# EAGLE board soic8 (EAGLE 5.07)
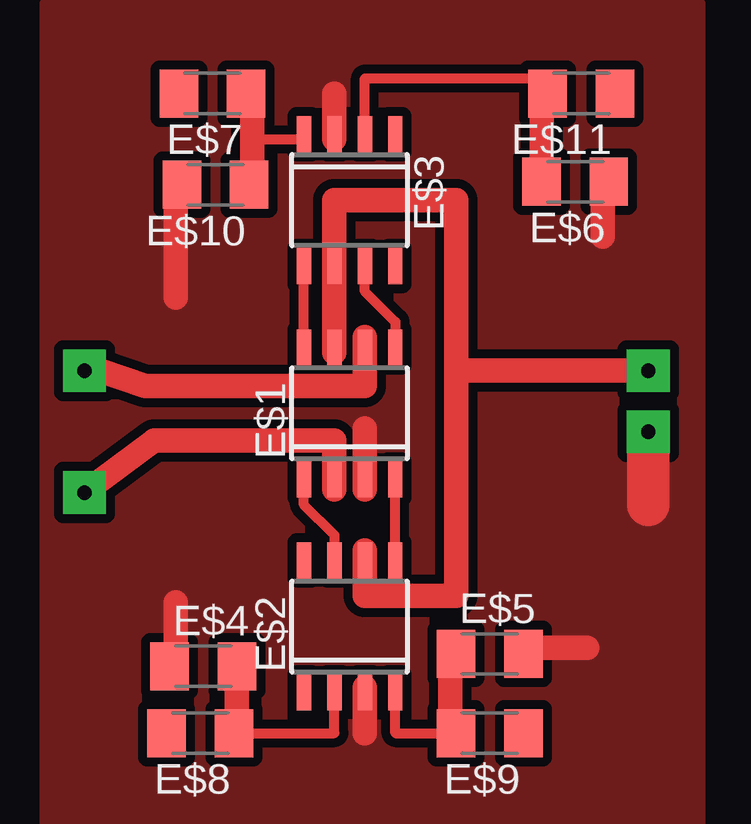
[diagram p0: board, top side]
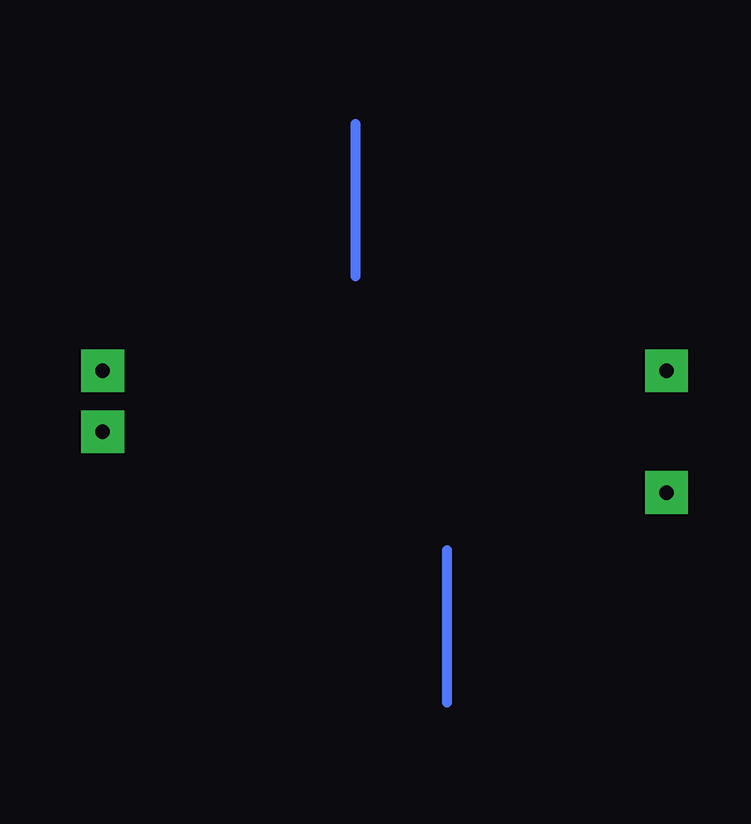
[diagram p1: board, bottom side, seen from below]

No outline drawn. Coordinates in mm, seen from the top.
Copper layers (1*16): Top 0.035mm / dielectric 1.5mm / Bottom 0.035mm
Design rules "default *": minimum track width 10mil, minimum drill 24mil, track to track 15mil, track to pad 20mil, pad to pad 8mil, via to via 8mil, smd to smd 8mil, copper to edge 40mil, drill to drill 8mil, minimum pad ring 10mil, minimum via ring 8mil, stop-mask expansion 4mil, vias tented up to drill 0mil, thermal gap 10mil

## Footprints (pad centres in the part's own frame; a part is rotated, then mirrored left to right if it is on the bottom)
SOIC8 = smd 0.6 x 1.5: 1 -1.905,-2.75; 2 -0.635,-2.75; 3 0.635,-2.75; 4 1.905,-2.75; 5 1.905,2.75; 6 0.635,2.75; 7 -0.635,2.75; 8 -1.905,2.75
M1206 = smd 1.6 x 2: 1 -1.4,0; 2 1.4,0

## Placement (x,y rotation side)
E$1  [SOIC8]  12.95,17.27 0 top
E$2  [SOIC8]  12.95,8.38 0 top
E$3  [SOIC8]  12.95,26.16 180 top
E$4  [M1206]  6.86,6.73 0 top
E$5  [M1206]  18.8,7.24 0 top
E$6  [M1206]  22.35,26.92 180 top
E$7  [M1206]  7.24,30.61 180 top
E$8  [M1206]  6.73,3.94 180 top
E$9  [M1206]  18.8,3.94 180 top
E$10  [M1206]  7.37,26.8 180 top
E$11  [M1206]  22.61,30.61 180 top

## Library data of the parts
E$1-E$3 = linear
E$4-E$11 = rcl

## Tracks (layer width: path | path; a pad name or v marks a point on that pad's centre or on a via)
GND
  Top 1.016: 13.59,3.94 13.59,5.84 | 13.59,14.1 13.59,16.64 | 12.32,28.7 12.32,30.61 | 23.5,24.64 23.5,26.54 | 5.71,22.1 5.71,26.54 | 5.71,7.49 5.71,9.4 | 20.32,7.49 22.86,7.49
  Top 1.778: 25.4,13.46 25.4,16
  pour Top: 0.25,34.42 27.56,34.42 27.56,0.13 0.25,0.13
S$1
  Top 0.406: 11.05,20.45 11.05,22.99
S$2
  Top 0.406: 13.59,22.99 13.59,22.35 14.86,21.08 14.86,20.45
S$3
  Top 1.016: 12.32,19.81 12.32,22.99
S$4
  Top 1.016: 20.95,27.81 20.95,30.99
S$5
  Bottom 0.406: 11.05,5.21 11.05,11.56
S$6
  Bottom 0.406: 14.86,22.99 14.86,29.34
S$7
  Top 0.406: 12.32,11.56 12.32,12.19 11.05,13.46 11.05,14.1
S$8
  Top 0.406: 14.86,10.92 14.86,14.1
S$9  (via drill 0.6 pad 1.78)
  Top 1.016: 13.59,11.56 13.59,9.65 17.4,9.65 17.4,19.05 | 17.4,19.05 17.4,26.16 12.32,26.16 12.32,22.99 | 17.4,19.05 v25.4,19.05 25.65,19.05
S$10  (via drill 0.6 pad 1.78)
  Top 1.016: 13.59,20.45 13.59,18.41 4.45,18.41 2.54,19.05 v1.91,19.05 2.16,19.05
S$11
  Top 1.016: 12.32,14.1 12.32,16.13 4.83,16.13 1.91,13.97
S$12
  Top 1.016: 8.89,27.81 8.89,30.35
S$13
  Top 0.406: 9.14,28.7 11.05,28.7
S$14
  Top 0.406: 20.57,31.24 13.59,31.24 13.59,29.34
S$15
  Top 0.406: 8.51,3.94 12.32,3.94 12.32,5.21
S$16
  Top 0.406: 14.86,5.21 14.86,3.94 16.76,3.94
S$17
  Top 1.016: 8.26,4.32 8.26,6.86
S$18
  Top 1.016: 17.14,3.68 17.14,6.86
S$19  (via drill 0.6 pad 1.78)
  other vias: 1.91,13.97
S$20  (via drill 0.6 pad 1.78)
  other vias: 25.4,16.51